# EAGLE board AL60 (EAGLE 5.11)
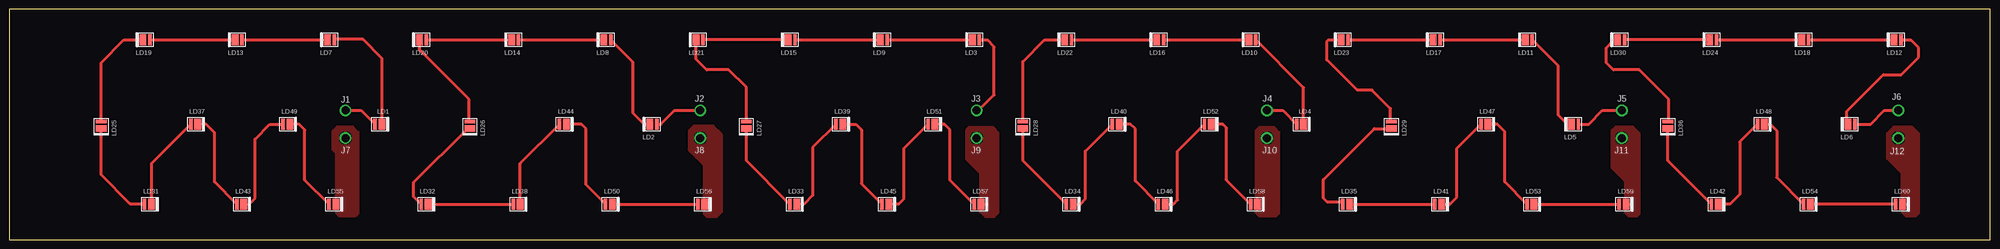
[diagram p0: board, top side]

Size 546.1 x 63.5 mm. Coordinates in mm from the lower left corner, seen from the top.
Outline: 0,0 546.1,0 546.1,63.5 0,63.5 0,0
Copper layers (1*16): Top 0.0356mm / dielectric 1.5011mm / Bottom 0.0356mm
Design rules "oshPark": minimum track width 6mil, minimum drill 13mil, track to track 6mil, track to pad 6mil, pad to pad 6mil, via to via 6mil, smd to smd 6mil, copper to edge 15mil, drill to drill 6mil, minimum pad ring 7mil, minimum via ring 7mil, stop-mask expansion 4mil, vias tented up to drill 0mil, thermal gap 10mil

## Footprints (pad centres in the part's own frame; a part is rotated, then mirrored left to right if it is on the bottom)
14AWG-SOLDERPOINT = drill 2.2 round: P$1 0,0
DS_XHB = smd 0.95 x 3: ANODE 0.725,0 | smd 1.85 x 3: CATHODE -1.175,0

## Placement (x,y rotation side)
J1  HDR-1X1-14AWG  [14AWG-SOLDERPOINT]  92.71,35.56 0 top
J2  HDR-1X1-14AWG  [14AWG-SOLDERPOINT]  190.5,35.56 0 top
J3  HDR-1X1-14AWG  [14AWG-SOLDERPOINT]  266.7,35.56 0 top
J4  HDR-1X1-14AWG  [14AWG-SOLDERPOINT]  346.71,35.56 0 top
J5  HDR-1X1-14AWG  [14AWG-SOLDERPOINT]  444.5,35.56 0 top
J6  HDR-1X1-14AWG  [14AWG-SOLDERPOINT]  520.7,35.56 0 top
J7  HDR-1X1-14AWG  [14AWG-SOLDERPOINT]  92.71,27.94 0 top
J8  HDR-1X1-14AWG  [14AWG-SOLDERPOINT]  190.5,27.94 0 top
J9  HDR-1X1-14AWG  [14AWG-SOLDERPOINT]  266.7,27.94 0 top
J10  HDR-1X1-14AWG  [14AWG-SOLDERPOINT]  346.71,27.94 0 top
J11  HDR-1X1-14AWG  [14AWG-SOLDERPOINT]  444.5,27.94 0 top
J12  HDR-1X1-14AWG  [14AWG-SOLDERPOINT]  520.7,27.94 0 top
LD1  LED-DS_XHB  [DS_XHB]  101.6,31.75 180 top
LD2  LED-DS_XHB  [DS_XHB]  177.8,31.75 0 top
LD3  LED-DS_XHB  [DS_XHB]  266.7,55.02 0 top
LD4  LED-DS_XHB  [DS_XHB]  355.6,31.75 180 top
LD5  LED-DS_XHB  [DS_XHB]  431.8,31.75 0 top
LD6  LED-DS_XHB  [DS_XHB]  508,31.75 0 top
LD7  LED-DS_XHB  [DS_XHB]  88.9,55.02 0 top
LD8  LED-DS_XHB  [DS_XHB]  165.1,55.02 0 top
LD9  LED-DS_XHB  [DS_XHB]  241.3,55.02 0 top
LD10  LED-DS_XHB  [DS_XHB]  342.9,55.02 0 top
LD11  LED-DS_XHB  [DS_XHB]  419.1,55.02 0 top
LD12  LED-DS_XHB  [DS_XHB]  520.7,55.02 0 top
LD13  LED-DS_XHB  [DS_XHB]  63.5,55.02 0 top
LD14  LED-DS_XHB  [DS_XHB]  139.7,55.02 0 top
LD15  LED-DS_XHB  [DS_XHB]  215.9,55.02 0 top
LD16  LED-DS_XHB  [DS_XHB]  317.5,55.02 0 top
LD17  LED-DS_XHB  [DS_XHB]  393.7,55.02 0 top
LD18  LED-DS_XHB  [DS_XHB]  495.3,55.02 0 top
LD19  LED-DS_XHB  [DS_XHB]  38.1,55.02 0 top
LD20  LED-DS_XHB  [DS_XHB]  114.3,55.02 0 top
LD21  LED-DS_XHB  [DS_XHB]  190.5,55.02 0 top
LD22  LED-DS_XHB  [DS_XHB]  292.1,55.02 0 top
LD23  LED-DS_XHB  [DS_XHB]  368.3,55.02 0 top
LD24  LED-DS_XHB  [DS_XHB]  469.9,55.02 0 top
LD25  LED-DS_XHB  [DS_XHB]  25.4,31.75 90 top
LD26  LED-DS_XHB  [DS_XHB]  127,31.75 90 top
LD27  LED-DS_XHB  [DS_XHB]  203.2,31.75 90 top
LD28  LED-DS_XHB  [DS_XHB]  279.4,31.75 90 top
LD29  LED-DS_XHB  [DS_XHB]  381,31.75 90 top
LD30  LED-DS_XHB  [DS_XHB]  444.5,55.02 0 top
LD31  LED-DS_XHB  [DS_XHB]  38.1,9.75 180 top
LD32  LED-DS_XHB  [DS_XHB]  114.3,9.75 180 top
LD33  LED-DS_XHB  [DS_XHB]  215.9,9.75 180 top
LD34  LED-DS_XHB  [DS_XHB]  292.1,9.75 180 top
LD35  LED-DS_XHB  [DS_XHB]  368.3,9.75 180 top
LD36  LED-DS_XHB  [DS_XHB]  457.2,31.75 90 top
LD37  LED-DS_XHB  [DS_XHB]  50.8,31.75 180 top
LD38  LED-DS_XHB  [DS_XHB]  139.7,9.75 180 top
LD39  LED-DS_XHB  [DS_XHB]  228.6,31.75 180 top
LD40  LED-DS_XHB  [DS_XHB]  304.8,31.75 180 top
LD41  LED-DS_XHB  [DS_XHB]  393.7,9.75 180 top
LD42  LED-DS_XHB  [DS_XHB]  469.9,9.75 180 top
LD43  LED-DS_XHB  [DS_XHB]  63.5,9.75 180 top
LD44  LED-DS_XHB  [DS_XHB]  152.4,31.75 180 top
LD45  LED-DS_XHB  [DS_XHB]  241.3,9.75 180 top
LD46  LED-DS_XHB  [DS_XHB]  317.5,9.75 180 top
LD47  LED-DS_XHB  [DS_XHB]  406.4,31.75 180 top
LD48  LED-DS_XHB  [DS_XHB]  482.6,31.75 180 top
LD49  LED-DS_XHB  [DS_XHB]  76.2,31.75 180 top
LD50  LED-DS_XHB  [DS_XHB]  165.1,9.75 180 top
LD51  LED-DS_XHB  [DS_XHB]  254,31.75 180 top
LD52  LED-DS_XHB  [DS_XHB]  330.2,31.75 180 top
LD53  LED-DS_XHB  [DS_XHB]  419.1,9.75 180 top
LD54  LED-DS_XHB  [DS_XHB]  495.3,9.75 180 top
LD55  LED-DS_XHB  [DS_XHB]  88.9,9.75 180 top
LD56  LED-DS_XHB  [DS_XHB]  190.5,9.75 180 top
LD57  LED-DS_XHB  [DS_XHB]  266.7,9.75 180 top
LD58  LED-DS_XHB  [DS_XHB]  342.9,9.75 180 top
LD59  LED-DS_XHB  [DS_XHB]  444.5,9.75 180 top
LD60  LED-DS_XHB  [DS_XHB]  520.7,9.75 180 top

## Library data of the parts
J1-J12 = Mechanical
LD1-LD60 = Discrete

## Nets
GND1: J7.P$1 LD55.CATHODE
GND2: J8.P$1 LD56.CATHODE
GND3: J9.P$1 LD57.CATHODE
GND4: J10.P$1 LD58.CATHODE
GND5: J11.P$1 LD59.CATHODE
GND6: J12.P$1 LD60.CATHODE
N$1: LD1.CATHODE LD7.ANODE
N$2: LD7.CATHODE LD13.ANODE
N$3: LD13.CATHODE LD19.ANODE
N$4: LD19.CATHODE LD25.ANODE
N$5: LD25.CATHODE LD31.ANODE
N$6: LD31.CATHODE LD37.ANODE
N$7: LD37.CATHODE LD43.ANODE
N$8: LD43.CATHODE LD49.ANODE
N$9: LD49.CATHODE LD55.ANODE
N$12: LD2.CATHODE LD8.ANODE
N$13: LD8.CATHODE LD14.ANODE
N$14: LD14.CATHODE LD20.ANODE
N$15: LD20.CATHODE LD26.ANODE
N$16: LD26.CATHODE LD32.ANODE
N$17: LD32.CATHODE LD38.ANODE
N$18: LD38.CATHODE LD44.ANODE
N$19: LD44.CATHODE LD50.ANODE
N$20: LD50.CATHODE LD56.ANODE
N$21: J2.P$1 LD2.ANODE
N$22: J3.P$1 LD3.ANODE
N$23: J4.P$1 LD4.ANODE
N$24: LD51.CATHODE LD57.ANODE
N$25: LD45.CATHODE LD51.ANODE
N$26: LD39.CATHODE LD45.ANODE
N$27: LD33.CATHODE LD39.ANODE
N$28: LD27.CATHODE LD33.ANODE
N$29: LD21.CATHODE LD27.ANODE
N$30: LD15.CATHODE LD21.ANODE
N$31: LD9.CATHODE LD15.ANODE
N$32: LD3.CATHODE LD9.ANODE
N$35: LD48.CATHODE LD54.ANODE
N$36: LD4.CATHODE LD10.ANODE
N$37: LD10.CATHODE LD16.ANODE
N$38: LD16.CATHODE LD22.ANODE
N$39: LD22.CATHODE LD28.ANODE
N$40: LD28.CATHODE LD34.ANODE
N$41: LD34.CATHODE LD40.ANODE
N$42: LD40.CATHODE LD46.ANODE
N$43: LD46.CATHODE LD52.ANODE
N$44: J5.P$1 LD5.ANODE
N$45: J6.P$1 LD6.ANODE
N$46: LD52.CATHODE LD58.ANODE
N$47: LD5.CATHODE LD11.ANODE
N$48: LD11.CATHODE LD17.ANODE
N$49: LD17.CATHODE LD23.ANODE
N$50: LD23.CATHODE LD29.ANODE
N$51: LD29.CATHODE LD35.ANODE
N$52: LD35.CATHODE LD41.ANODE
N$53: LD41.CATHODE LD47.ANODE
N$54: LD47.CATHODE LD53.ANODE
N$56: LD53.CATHODE LD59.ANODE
N$57: LD54.CATHODE LD60.ANODE
N$58: LD42.CATHODE LD48.ANODE
N$59: LD36.CATHODE LD42.ANODE
N$60: LD30.CATHODE LD36.ANODE
N$62: LD24.CATHODE LD30.ANODE
N$63: LD18.CATHODE LD24.ANODE
N$64: LD12.CATHODE LD18.ANODE
N$66: LD6.CATHODE LD12.ANODE
VCC_S1: J1.P$1 LD1.ANODE

## Tracks (layer width: path | path; a pad name or v marks a point on that pad's centre or on a via)
GND1
  pour Top: 89.15,25.91 89.15,24.89 90.17,23.88 90.17,7.37 90.93,6.6 95.5,6.6 96.27,7.37 96.27,29.46 94.74,30.99 90.42,30.99 89.41,29.97 89.15,29.72
GND2
  pour Top: 187.45,29.97 187.45,24.64 189.48,22.61 191.52,20.57 191.52,7.11 192.28,6.35 195.07,6.35 196.34,7.62 196.34,28.96 194.06,31.24 188.72,31.24
GND3
  pour Top: 263.91,28.96 263.91,22.1 267.46,18.54 267.72,18.29 267.72,7.62 268.99,6.35 271.53,6.35 272.54,7.37 272.54,29.46 271.27,30.73 264.41,30.73 263.91,30.23
GND4
  pour Top: 343.66,29.72 343.66,7.37 344.42,6.6 349.25,6.6 349.5,6.86 350.01,7.37 350.01,29.46 348.74,30.73 344.42,30.73 343.66,29.97
GND5
  pour Top: 441.71,29.72 441.71,19.81 445.01,16.51 445.52,16 445.52,7.37 446.28,6.6 448.82,6.6 449.07,6.86 449.33,7.11 449.33,29.21 447.55,30.99 442.72,30.99 441.71,29.97
GND6
  pour Top: 517.65,28.96 517.65,22.35 521.46,18.54 521.72,18.29 521.72,7.62 522.73,6.6 525.53,6.6 526.29,7.37 526.29,29.21 524.51,30.99 519.43,30.99 517.65,29.21
N$1
  Top 0.813: LD1.CATHODE 102.78,49.88 97.54,55.12 89.73,55.12 LD7.ANODE
N$2
  Top 0.813: LD13.ANODE LD7.CATHODE
N$3
  Top 0.813: LD19.ANODE LD13.CATHODE
N$4
  Top 0.813: LD19.CATHODE 31.65,55.02 25.4,48.77 LD25.ANODE
N$5
  Top 0.813: LD25.CATHODE 25.4,17.78 33.27,9.91 37.22,9.91 LD31.ANODE
N$6
  Top 0.813: LD31.CATHODE 39.27,20.95 LD37.ANODE
N$7
  Top 0.813: LD37.CATHODE 54.36,31.75 56.64,29.46 56.64,15.89 LD43.ANODE
N$8
  Top 0.813: LD43.CATHODE 66.14,9.75 67.82,11.43 67.82,27.69 71.88,31.75 LD49.ANODE
N$9
  Top 0.813: LD49.CATHODE 80.01,31.75 81.53,30.23 81.53,16.39 LD55.ANODE
N$12
  Top 0.813: LD2.CATHODE 175.01,31.75 171.96,34.8 171.96,48.88 LD8.ANODE
N$13
  Top 0.813: LD14.ANODE LD8.CATHODE
N$14
  Top 0.813: LD20.ANODE LD14.CATHODE
N$15
  Top 0.813: LD20.CATHODE 113.12,52.23 126.75,38.61 126.75,32.73 LD26.ANODE
N$16
  Top 0.813: LD26.CATHODE 126.33,30.57 111.51,15.75 111.51,11.82 LD32.ANODE
N$17
  Top 0.813: LD32.CATHODE LD38.ANODE
N$18
  Top 0.813: LD38.CATHODE 140.88,20.95 LD44.ANODE
N$19
  Top 0.813: LD44.CATHODE 157.73,31.75 159,30.48 159,15.12 LD50.ANODE
N$20
  Top 0.813: LD50.CATHODE LD56.ANODE
N$21
  Top 0.813: LD2.ANODE 179.58,31.75 183.39,35.56 J2.P$1
N$22
  Top 0.813: J3.P$1 267.21,35.56 271.53,39.88 271.53,53.09 269.75,54.86 267.58,54.86 LD3.ANODE
N$23
  Top 0.813: 354.62,32 LD4.ANODE 351.06,35.56 J4.P$1
N$24
  Top 0.813: LD51.CATHODE 257.81,31.75 259.33,30.23 259.33,16.39 LD57.ANODE
N$25
  Top 0.813: LD45.CATHODE 245.21,9.75 246.63,11.18 246.63,25.11 LD51.ANODE
N$26
  Top 0.813: LD39.CATHODE 233.43,31.75 234.95,30.23 234.95,15.38 LD45.ANODE
N$27
  Top 0.813: LD33.CATHODE 219.05,9.75 221.49,12.19 221.49,25.36 LD39.ANODE
N$28
  Top 0.813: LD27.CATHODE 203.2,21.73 LD33.ANODE
N$29
  Top 0.813: LD21.CATHODE 189.32,49.69 192.28,46.74 198.37,46.74 203.2,41.91 LD27.ANODE
N$30
  Top 0.813: LD15.CATHODE LD21.ANODE
N$31
  Top 0.813: LD15.ANODE LD9.CATHODE
N$32
  Top 0.813: LD9.ANODE LD3.CATHODE
N$35
  Top 0.813: LD48.CATHODE 485.39,31.75 487.17,29.97 487.17,17.16 LD54.ANODE
N$36
  Top 0.813: LD4.CATHODE 356.77,41.87 LD10.ANODE
N$37
  Top 0.813: LD16.ANODE LD10.CATHODE
N$38
  Top 0.813: LD22.ANODE LD16.CATHODE
N$39
  Top 0.813: LD22.CATHODE 285.39,55.02 279.4,49.02 LD28.ANODE
N$40
  Top 0.813: LD28.CATHODE 279.4,21.73 LD34.ANODE
N$41
  Top 0.813: LD34.CATHODE 295.25,9.75 296.67,11.18 296.67,24.35 LD40.ANODE
N$42
  Top 0.813: LD40.CATHODE 309.12,31.75 310.39,30.48 310.39,16.14 LD46.ANODE
N$43
  Top 0.813: LD46.CATHODE 320.9,9.75 322.07,10.92 322.07,24.35 LD52.ANODE
N$44
  Top 0.813: J5.P$1 439.17,35.56 435.36,31.75 LD5.ANODE
N$45
  Top 0.813: LD6.ANODE 513.08,31.75 516.89,35.56 J6.P$1
N$46
  Top 0.813: LD52.CATHODE 334.52,31.75 335.53,30.73 335.53,16.39 LD58.ANODE
N$47
  Top 0.813: LD5.CATHODE 429.51,31.75 426.97,34.29 426.97,47.87 LD11.ANODE
N$48
  Top 0.813: LD17.ANODE LD11.CATHODE
N$49
  Top 0.813: LD23.ANODE LD17.CATHODE
N$50
  Top 0.813: LD23.CATHODE 363.63,55.02 363.22,54.61 363.22,49.53 371.6,41.15 375.67,41.15 380.75,36.07 380.75,32.73 LD29.ANODE
N$51
  Top 0.813: LD29.CATHODE 376.27,30.57 362.2,16.51 362.2,11.43 363.22,10.41 366.92,10.41 LD35.ANODE
N$52
  Top 0.813: LD35.CATHODE LD41.ANODE
N$53
  Top 0.813: LD41.CATHODE 397.1,9.75 399.03,11.68 399.03,25.11 LD47.ANODE
N$54
  Top 0.813: LD47.CATHODE 410.21,31.75 412.24,29.72 412.24,15.89 LD53.ANODE
N$56
  Top 0.813: LD53.CATHODE LD59.ANODE
N$57
  Top 0.813: LD60.ANODE LD54.CATHODE
N$58
  Top 0.813: LD42.CATHODE 474.32,9.75 477.01,12.45 477.01,26.89 LD48.ANODE
N$59
  Top 0.813: LD36.CATHODE 457.2,21.73 LD42.ANODE
N$60
  Top 0.813: LD30.CATHODE 442.37,55.02 440.18,52.83 440.18,48.77 442.21,46.74 449.33,46.74 457.45,38.61 457.45,32.73 LD36.ANODE
N$62
  Top 0.813: LD24.CATHODE LD30.ANODE
N$63
  Top 0.813: LD24.ANODE LD18.CATHODE
N$64
  Top 0.813: LD18.ANODE LD12.CATHODE
N$66
  Top 0.813: LD12.ANODE 521.58,54.86 524.26,54.86 526.29,52.83 526.29,50.29 521.46,45.47 516.64,45.47 506.48,35.31 506.48,32.1 LD6.CATHODE
VCC_S1
  Top 0.813: LD1.ANODE 100.84,31.75 97.03,35.56 J1.P$1

## Text on the board
Document: 21.50" | .866" | 2.5" | .384" | 1.0"